# EAGLE board Mini Project - Board - Multilevel Power Supply (EAGLE 9.6.2)
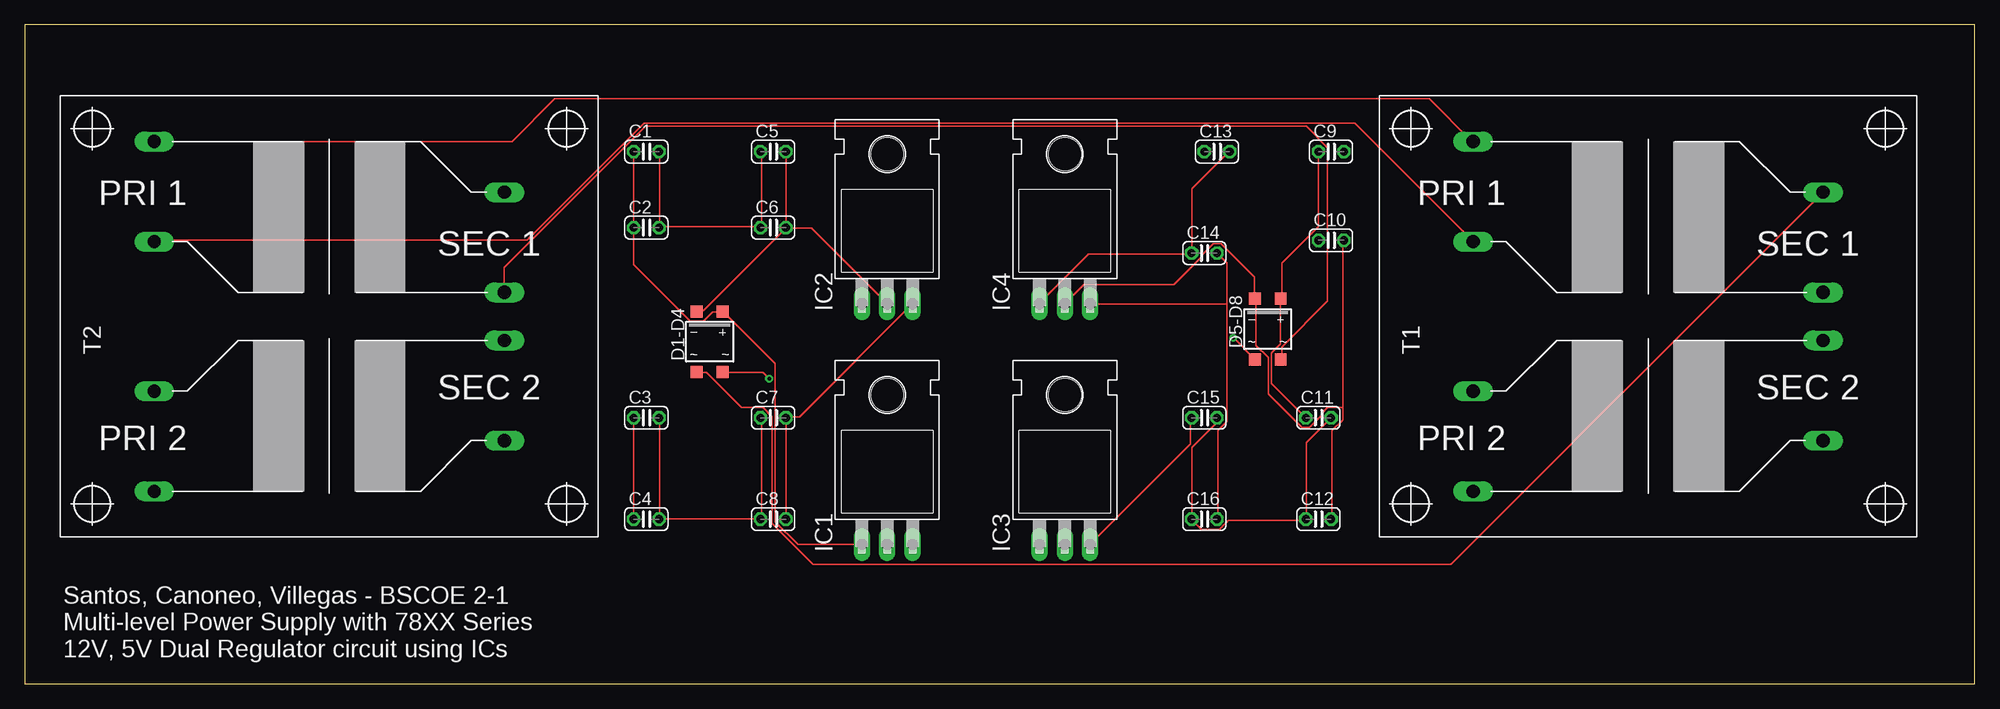
[diagram p0: board, top side]
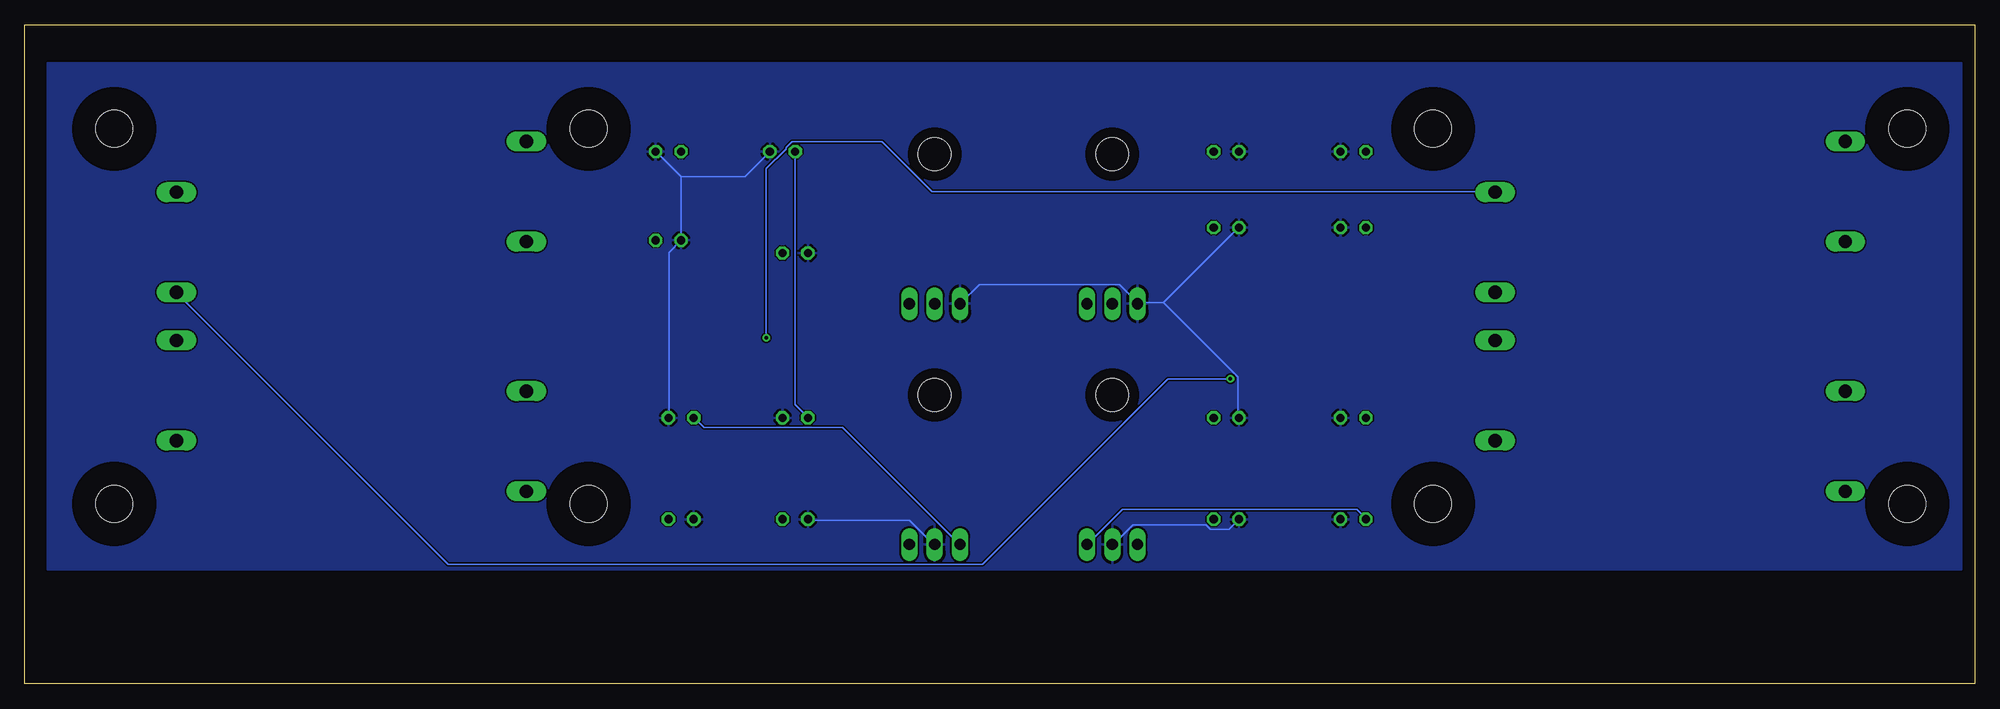
[diagram p1: board, bottom side, seen from below]

Size 195.25 x 66.03 mm. Coordinates in mm from the lower left corner, seen from the top.
Outline: 0,0 195.25,0 195.25,66.03 0,66.03 0,0
Copper layers (1*16): Top 0.035mm / dielectric 1.5mm / Bottom 0.035mm
Design rules "default": minimum track width 6mil, minimum drill 0.35mm, track to track 6mil, track to pad 6mil, pad to pad 6mil, via to via 6mil, smd to smd 6mil, copper to edge 40mil, drill to drill 6mil, minimum pad ring 10mil, minimum via ring 8mil, stop-mask expansion 4mil, vias tented up to drill 0mil, thermal gap 10mil

## Footprints (pad centres in the part's own frame; a part is rotated, then mirrored left to right if it is on the bottom)
C025-024X044 = drill 0.813 octagon: 1 -1.27,0; 2 1.27,0
SOIC-4 = smd 1.2 x 1.2: + 1.3,3.05; - -1.3,3.05; ~1 -1.3,-3.05; ~2 1.3,-3.05
TO220H = drill 1.118 long: 1 -2.54,-10.16; 2 0,-10.16; 3 2.54,-10.16 | hole 3.302: 0,4.826
T70-E = drill 1.321 long: 1 -17.526,17.526; 2 -17.526,7.493; 3 -17.526,-7.493; 4 -17.526,-17.526; 5 17.526,12.446; 6 17.526,2.413; 7 17.526,-2.413; 8 17.526,-12.446 | hole 3.708: 23.749,18.796; 23.749,-18.796; -23.749,-18.796; -23.749,18.796

## Placement (x,y rotation side)
C1  2200μF  [C025-024X044]  62.23,53.34 0 top
C2  0.1μF  [C025-024X044]  62.23,45.72 0 top
C3  100μF  [C025-024X044]  62.23,26.67 0 top
C4  0.1μF  [C025-024X044]  62.23,16.51 0 top
C5  2200μF  [C025-024X044]  74.93,53.34 0 top
C6  0.1μF  [C025-024X044]  74.93,45.72 0 top
C7  100μF  [C025-024X044]  74.93,26.67 0 top
C8  0.1μF  [C025-024X044]  74.93,16.51 0 top
C9  2200μF  [C025-024X044]  130.81,53.34 0 top
C10  2200μF  [C025-024X044]  130.81,44.45 0 top
C11  0.1μF  [C025-024X044]  129.54,26.67 0 top
C12  0.1μF  [C025-024X044]  129.54,16.51 0 top
C13  100μF  [C025-024X044]  119.38,53.34 0 top
C14  100μF  [C025-024X044]  118.11,43.18 0 top
C15  0.1μF  [C025-024X044]  118.11,26.67 0 top
C16  0.1μF  [C025-024X044]  118.11,16.51 0 top
D1-D4  15V  [SOIC-4]  68.58,34.29 0 top
D5-D8  9V  [SOIC-4]  124.46,35.56 0 top
IC1  7812T  [TO220H]  86.36,24.13 0 top
IC2  [TO220H]  86.36,48.26 0 top
IC3  7805T  [TO220H]  104.14,24.13 0 top
IC4  [TO220H]  104.14,48.26 0 top
T1  15V  [T70-E]  162.56,36.83 0 top
T2  9V  [T70-E]  30.48,36.83 0 top

## Library data of the parts
C1-C16 = rcl; SPICEPREFIX: C
D1-D4 D5-D8 = rectifier
IC1-IC4 = linear
T1 T2 = special

## Nets
+5V: C13.1 C15.1 IC3.3
+12V: C3.1 C4.1 IC1.3
-5V: C14.2 C16.2 IC4.3
-12V: C7.2 C8.2 IC2.3
GND: C1.2 C2.2 C3.2 C4.2 C5.1 C6.1 C7.1 C8.1 C9.2 C10.1 C11.2 C12.1 C13.2 C14.1 C15.2 C16.1 IC1.2 IC2.1 IC3.2 IC4.1
N$1: T1.1 T2.1
N$2: T1.2 T2.2
N$3: D1-D4.~1 T1.5
N$4: D1-D4.~2 T1.6
N$5: C1.1 C2.1 D1-D4.+ IC1.1
N$6: C5.2 C6.2 D1-D4.- IC2.2
N$7: D5-D8.~1 T2.5
N$8: D5-D8.~2 T2.6
N$10: C9.1 C11.1 D5-D8.+ IC3.1
N$12: C10.2 C12.2 D5-D8.- IC4.2

## Tracks (layer width: path | path; a pad name or v marks a point on that pad's centre or on a via)
+5V
  Top 0.152: IC3.3 116.74,24.03 116.74,26.62 C15.1
  Bottom 0.152: C13.1 118.11,27.99 116.89,26.77 C15.1
+12V
  Top 0.152: C3.1 C4.1
  Bottom 0.152: IC1.3 88.85,13.97 85.34,17.48 61.87,17.48 60.96,16.56 C4.1
-5V
  Top 0.152: 120.4,38.05 120.4,42.16 C14.2 | 120.4,38.05 120.4,26.31 119.48,25.4 119.48,16.56 C16.2 | 120.4,38.05 106.68,38.05 IC4.3
-12V
  Top 0.152: C8.2 C7.2 76.2,26.77 77.57,26.77 IC2.3
GND
  Top 0.152: 63.55,16.56 63.55,26.62 C3.2 | C7.1 73.76,26.62 73.76,16.56 C8.1 73.61,16.56 63.55,16.56 | 63.55,16.56 C4.2 | 63.55,45.82 63.55,53.29 C1.2 | C5.1 73.76,53.29 73.76,45.82 C6.1 73.61,45.82 63.55,45.82 | 63.55,45.82 C2.2 | C11.2 128.32,24.18 128.32,16.56 C12.1 128.17,16.41 120.55,16.41 119.63,15.49 117.81,15.49 116.89,16.41 C16.1 116.89,16.56 116.89,23.72 119.33,26.16 119.33,26.62 C15.2 | C13.2 120.55,53.29 116.89,49.63 116.89,43.23 C14.1 116.74,43.08 106.53,43.08 101.65,38.2 IC4.1
  Bottom 0.152: C8.1 74.68,15.49 76.5,15.49 76.96,15.95 84.28,15.95 86.26,13.97 IC1.2 | 81.23,38.2 83.82,38.2 | 81.23,38.2 73.76,45.67 C6.1 | 81.23,38.2 73.76,30.73 73.76,26.77 C7.1 | IC3.2 104.24,13.97 106.68,16.41 116.74,16.41 C16.1 | 129.54,50.85 C10.1 130.76,43.23 130.76,26.77 C11.2 | 129.54,50.85 131.98,53.29 C9.2 | 129.54,50.85 123.14,50.85 C13.2 | 83.82,38.2 85.65,40.03 99.67,40.03 IC4.1 | 83.82,38.2 IC2.1
  pour Bottom: 1.27,62.23 1.27,11.43 193.04,11.43 193.04,62.23
N$1
  Top 0.152: T2.1 48.77,54.36 53.03,58.62 140.66,58.62 144.93,54.36 T1.1
N$2
  Top 0.152: T2.2 12.95,44.45 50.29,44.45 62.03,56.19 133.2,56.19 144.93,44.45 T1.2
N$3
  Top 0.152: T1.5 142.8,11.99 78.94,11.99 74.83,16.1 74.83,26.77 73.91,27.69 71.78,27.69 68.28,31.19 67.36,31.19 D1-D4.~1
N$4  (via drill 0.35)
  Top 0.152: v74.52,30.58 73.91,31.19 69.95,31.19 D1-D4.~2
  Bottom 0.152: v74.52,30.58 80.77,30.58 99.36,11.99 152.86,11.99 179.98,39.12 T1.6
N$5
  Top 0.152: C1.1 C2.1 60.96,42.01 66.6,36.37 67.97,36.37 68.89,37.29 69.8,37.29 D1-D4.+ 69.95,37.29 75.13,32.11 75.13,16.26 77.42,13.97 IC1.1
N$6
  Top 0.152: 76.2,45.67 67.97,37.44 67.36,37.44 D1-D4.- | C5.2 C6.2 76.2,45.67 | IC2.2 78.79,45.67 76.2,45.67
N$7  (via drill 0.35)
  Top 0.152: v121.01,34.7 123.14,32.56 D5-D8.~1
  Bottom 0.152: v121.01,34.7 121.01,51.61 119.02,53.59 119.02,53.75 118.42,54.36 109.42,54.36 104.39,49.33 48.01,49.33 T2.5
N$8
  Top 0.152: T2.6 48.01,41.71 62.18,55.88 128.32,55.88 130.45,53.75 130.45,38.35 125.88,33.78 125.88,32.56 D5-D8.~2
N$10
  Top 0.152: C11.1 124.82,30.12 124.82,33.17 125.73,34.09 125.73,38.51 D5-D8.+ 125.88,38.66 125.88,42.16 129.54,45.82 C9.1
  Bottom 0.152: IC3.1 101.65,13.97 113.39,25.7 127.25,25.7 128.17,26.62 C11.1
N$12
  Top 0.152: IC4.2 106.07,40.03 115.06,40.03 117.81,42.77 117.81,42.93 119.02,44.14 119.79,44.14 123.14,40.79 123.14,38.66 D5-D8.- 123.29,38.51 123.29,33.93 124.51,32.72 124.51,29.06 127.86,25.7 128.63,25.7 129.84,26.92 129.84,27.08 130.45,27.69 131.98,27.69 | 131.98,27.69 131.98,44.45 C10.2 | 131.98,27.69 131.98,26.47 130.91,25.4 130.91,16.56 C12.2

## Text on the board
tPlace: Santos, Canoneo, Villegas - BSCOE 2-1 / Multi-level Power Supply with 78XX Series / 12V, 5V Dual Regulator circuit using ICs